# Altium PCB 3.7V 2S锂电池V2.2-18650-封装.PcbDoc
Units mil, origin at the board's own origin, x right, y up, seen from the top; angles counter-clockwise.
Board outline 1766.62 x 4640.64 mil, 2 copper layers (Top Layer, Bottom Layer); 15 components, 32 nets, 60 pads, 0 vias.
Unrouted connection lines stored in the file: 145.
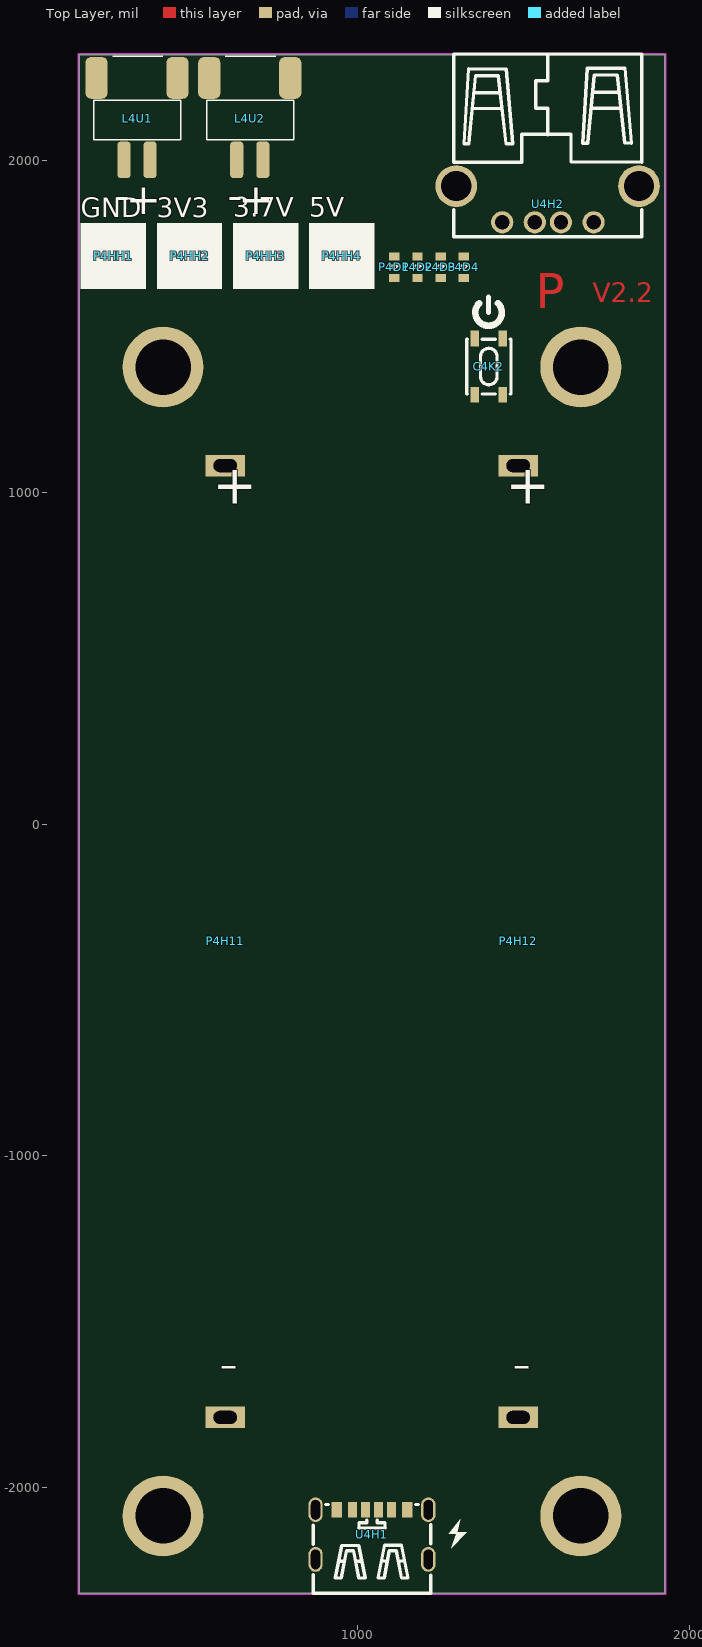
[diagram p0: Top Layer view]
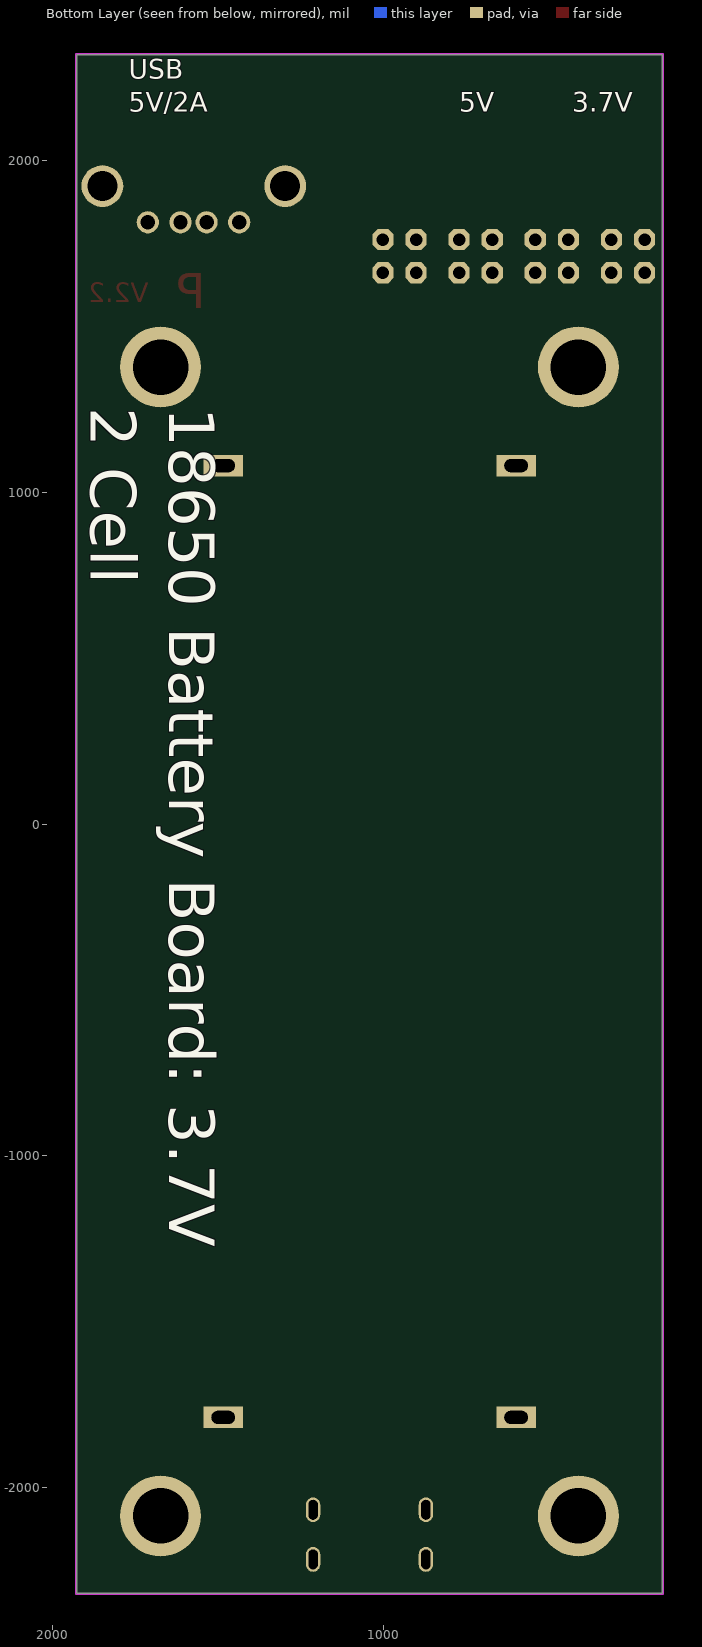
[diagram p1: Bottom Layer view, seen from below]

## Layer stack, top to bottom
Top Solder: solder mask 0.4, Solder Resist, Dk 3.5
Top Layer: signal copper 1.4
Dielectric1: dielectric 12.6, FR-4, Dk 4.8
Bottom Layer: signal copper 1.4
Bottom Solder: solder mask 0.4, Solder Resist, Dk 3.5

## Board outline
159.99,-2320.32 159.99,2320.32 1926.61,2320.32 1926.61,-2320.32

## Design rules (kind name [scope] priority, off if disabled: settings)
Clearance [All] p1: gap=7 ignorepadtopadclearanceinfootprint=FALSE
PolygonConnect [All] p1: connectstyle=Direct reliefconductorwidth=10 reliefentries=4 polygonreliefangle="90 Angle" airgapwidth=10
RoutingVias [All] p1: holewidth=12 width=18 viastyle="Through Hole" minholewidth=11.81 minwidth=18 maxholewidth=28 maxwidth=50
SolderMaskExpansion [All] p1: expansion=4 istentingtop=FALSE
Width [All] p1: maxlimit=78.74 minlimit=7 preferedwidth=10 minimp=50.000000 maximp=50.000000 favimp=50.000000
30 further rules are at their usual default settings.

## Classes and differential pairs
component class "3.7V 3S锂电池V2": PD1 PD2 PD3 PD4

## Components (designator, comment, footprint, x,y, rotation, side; value= is the part's Value field where it differs from the comment)
C4K2 "SMD KEY-3*4*2" "KEY 4.2*3.2*2.5（4P）" 1395.67,1379.57 r90 top
L4U1 "PH2.0 卧贴 2P" PH-2P-T 334.88,2010.68 r180 top value="5mm 光敏"
L4U2 "PH2.0 卧贴" PH-2P-T 674.88,2010.68 r180 top value="5mm 光敏"
P4D1 "SMD 0603 LED(绿色)(电量25%)" "0603 led" 1110.94,1678.99 r270 top
P4D2 "SMD 0603 LED(绿色)(电量50%)" "0603 led" 1180.68,1678.99 r270 top
P4D3 "SMD 0603 LED(绿色)(电量75%)" "0603 led" 1250.42,1678.99 r270 top
P4D4 "SMD 0603 LED(绿色)(电量100%)" "0603 led" 1320.16,1678.99 r270 top
P4H11 "18650 Battery 电池座" "18650 BATTERY Z" 600.89,-354.33 r0 top locked
P4H12 "18650 Battery 电池座" "18650 BATTERY Z" 1484.33,-354.33 r0 top locked
P4HH1 "Header 4 -2x2（黑色）" "2x2 Header" 263.74,1712.29 r90 top
P4HH2 "Header 4 -2x2（红色）" "2x2 Header" 493.4,1712.29 r90 top
P4HH3 "Header 4 -2x2（蓝色）" "2x2 Header" 723.06,1712.29 r90 top
P4HH4 "Header 4 -2x2（黄色）" "2x2 Header" 952.71,1712.29 r90 top
U4H1 "Type-C 6P" "TYPE-C 6P" 1043.29,-2142.83 r0 top
U4H2 "USB-A" USB-A母座 1571.73,1922.68 r180 top

## Footprints (in the part's own frame and the unit in brackets; to place one, negate y for a bottom-side part, rotate by r counter-clockwise, add the part's x,y. Pads: shape width x height; smd on the part's side, far side on the other; paste and mask are expansions set on the pad)
"2x2 Header" [mil]
  oct 63.9x63.9 / inner oct 60x60 / far side oct 63.9x63.9 hole 37.4: 1(-50,-50) 2(-50,50) 3(50,-50) 4(50,50)
"0603 led" [mm]
  rect 0.6x0.8 smd: 1(-0.812,0) 2(0.812,0)
  silkscreen extent -0.14,-0.32 0.18,0.33, body extent -0.64,-0.51 0.64,0.51, height 1.2
"18650 BATTERY Z" [mm]
  rect 3x1.65 hole 1 slot 1.8 at 0 deg: 1(0,36.45) 2(0,-36.45)
  body extent -10.41,-38.86 10.41,38.86, height 20
"KEY 4.2*3.2*2.5（4P）" [mm]
  rect 1.2x0.65 smd: 1(-2.15,1.075) 1(2.15,1.075) 2(-2.15,-1.075) 2(2.15,-1.075)
  silkscreen extent -2.1,-1.7 2.1,1.7, body extent -2.1,-1.7 2.1,1.7, height 3.5
PH-2P-T [mm]
  rrect50% 1.7x3.19 smd: 0(-3.1,-6.075) 0(3.1,-6.075)
  rrect50% 1x2.8 smd: 1(-1,0.2) 2(1,0.2)
  silkscreen extent -3.35,-7.75 3.3,-1.33, body extent -3.91,-7.72 4.09,0.88, height 5.55
"TYPE-C 6P" [mm]
  oval 1.1x1.9 hole 0.7 slot 1.5 at 90 deg: 7(-4.32,-1.9) 7(-4.32,1.9) 7(4.32,-1.9) 7(4.32,1.9)
  rect 0.7x1.2 smd: A5(-0.5,1.9) A9(1.5,1.9) B5(0.5,1.9) B9(-1.5,1.9)
  rect 0.8x1.2 smd: A12(2.7,1.9) B12(-2.7,1.9)
  silkscreen extent -4.5,-4.5 4.5,2.3, body extent -4.5,-4.5 4.5,2.5, height 3
USB-A母座 [mm]
  round 1.7 hole 1.1: 1(-3.556,2.745) 2(-1.054,2.745) 3(0.945,2.745) 4(3.444,2.745)
  round 3.2 hole 2.3: 5(-7.036,-0.027) 5(6.964,-0.027)
  silkscreen extent -7.23,-10.15 7.16,3.85, body extent -7.23,-10.15 7.16,3.85, height 3

## Part data
C4K2: library part SW_SPST_6MM, "KEY", Manufacturer="TE CONNECTIVITY / ALCOSWITCH", FARNELL=3801305, PART=FSM4JSMA
L4U1 L4U2: library part "Header 2", "Diode", LatestRevisionDate=17-Jul-2002, LatestRevisionNote="Re-released for DXP Platform.", Publisher="Altium Limited"
P4D1 P4D2 P4D3 P4D4: library part LED2, "Typical RED, GREEN, YELLOW, AMBER GaAs LED", PackageDocument=Feb-2002, LatestRevisionDate=17-Jul-2002, LatestRevisionNote="Re-released for DXP Platform.", PackageReference=3.2X1.6X1.1, Published=8-Jun-2000, Publisher="Altium Limited"
P4H11 P4H12: library part H, "Power Header", LatestRevisionDate=17-Jul-2002, LatestRevisionNote="Re-released for DXP Platform.", Publisher="Altium Limited"
P4HH1 P4HH2 P4HH3 P4HH4: library part "Header 4 -2x2"
U4H2: library part "Header 5", "MICRO USB", LatestRevisionDate=17-Jul-2002, LatestRevisionNote="Re-released for DXP Platform.", Publisher="Altium Limited"

## Free pads (board coordinates)
  round 244.09 hole 167.32: 0(413.38,-2086.61) 0(413.38,1377.96) 0(1673.22,-2086.61) 0(1673.22,1377.96)

## Nets (pads, with @x,y where several pads share a name; then routed paths per layer and width w, separated by ;. In a path a pad name is that pad's centre, name@x,y a point inside that pad or via, vN(x,y) a via of type N, cw(c..) or ccw(c..) an arc to the next point about the centre after c; other vN are vias at no path point)
3V3: P4HH2.1 P4HH2.2 P4HH2.3 P4HH2.4
5V: L4U2.1 P4HH4.1 P4HH4.2 P4HH4.3 P4HH4.4 U4H2.1
BAT+: L4U1.1 P4H11.1 P4H12.1 P4HH3.1 P4HH3.2 P4HH3.3 P4HH3.4
BAT-: P4H11.2 P4H12.2
GND: C4K2.1 L4U1.0 L4U1.2 L4U2.0 L4U2.2 P4HH1.1 P4HH1.2 P4HH1.3 P4HH1.4 U4H1.7 U4H1.A12 U4H1.B12 U4H2.4 U4H2.5
NetB2L1_1: 
NetB4L1_1: 
NetC2CR1_1: 
NetC2CR2_1: 
NetC2K2_2: 
NetC4CR1_1: U4H1.A5
NetC4CR2_1: U4H1.B5
NetC4K2_2: C4K2.2
NetP2D1_1: 
NetP2D1_2: 
NetP2D2_1: 
NetP2D2_2: 
NetP2DC2_2: 
NetP2R2_1: 
NetP4D1_1: P4D1.1 P4D3.1 P4D4.2
NetP4D1_2: P4D1.2
NetP4D2_1: P4D2.1
NetP4D2_2: P4D2.2 P4D3.2 P4D4.1
NetP4DC2_2: 
NetP4R2_1: 
PD1+: 
PD1-: 
PD2+: 
PD2-: 
PD+: U4H2.3
PD-: U4H2.2
USB+: U4H1.A9 U4H1.B9

## Keep-outs
Keep-Out Layer:
  lines w5: 1929.13,-2322.83 1929.13,2322.84 ; 1929.13,-2322.83 1929.13,2322.84 ; 1929.13,-2322.83 157.48,-2322.83 157.48,2322.84 1929.13,2322.84

## Other copper
Top Layer:
  text "V2.2" at 1708.66,1553.11 h100
  text "P" at 1537.71,1520.19 h180

## Silkscreen, mask and mechanical layers (free items; w line width, h text height)
Top Overlay:
  rectangle: 854.04,1613.86 1051.14,1811.93
  rectangle: 165.07,1613.86 362.16,1811.93
  rectangle: 394.73,1613.86 591.82,1811.93
  rectangle: 624.38,1613.86 821.48,1811.93
  region: 1309.96,-2096.82 1274.53,-2140.13 1298.15,-2140.13 1282.4,-2183.43 1329.65,-2136.19 1301.21,-2136.19
  lines w15: 1395.1,1542.56 1395.1,1589.31
  lines w20: 1366.81,1570.84 ccw(c1395.1,1542.56) 1423.38,1570.84
  text "-" at 313.34,1949.17 h157.48 r180
  text "+" at 407.25,1949.17 h157.48 r180
  text "-" at 653.34,1949.17 h157.48 r180
  text "+" at 747.25,1949.17 h157.48 r180
  text "3.7V" at 624.51,1811.42 h100
  text "5V" at 854.17,1811.42 h100
  text "GND" at 165.19,1810.4 h100
  text "3V3" at 394.85,1810.4 h100
  text "+" at 563.45,925.87 h200
  text "+" at 1446.88,925.87 h200
  text "-" at 582.38,-1718.22 h200
  text "-" at 1465.82,-1718.22 h200
Bottom Overlay:
  text "3.7V" at 432.47,2128.49 h100
  text "5V" at 772.47,2128.49 h100
  text "USB / 5V/2A" at 1769.99,2128.49 h100
  text "18650 Battery Board: 3.7V / 2 Cell" at 1929.13,1257.09 h236.22 r90
Top Solder:
  text "V2.2" at 1708.66,1553.11 h100
  text "P" at 1537.71,1520.19 h180